# EAGLE board Servo motor with Arduino  (EAGLE 9.7.0)

Size 205.78 x 82.24 mm. Coordinates in mm from the lower left corner, seen from the top.
Outline: 0,0 205.78,0 205.78,82.24 0,82.24 0,0
Copper layers (1*16): Top 0.035mm / dielectric 1.5mm / Bottom 0.035mm
Design rules "default": minimum track width 6mil, minimum drill 0.35mm, track to track 6mil, track to pad 6mil, pad to pad 6mil, via to via 6mil, smd to smd 6mil, copper to edge 40mil, drill to drill 6mil, minimum pad ring 10mil, minimum via ring 8mil, stop-mask expansion 4mil, vias tented up to drill 0mil, thermal gap 10mil

## Footprints (pad centres in the part's own frame; a part is rotated, then mirrored left to right if it is on the bottom)
HA-06-SM065 = drill 1 pad 1.676: 1 -2.54,-2.54; 2 0,2.54; 3 2.54,-2.54
SG90 = drill 1.016 long: 1 -2.54,0; 2 0,0; 3 2.54,0
ARDUINO-UNO-R3-SHIELD = drill 1.016 pad 1.88: 3.3V 24.13,-2.54; 5V 24.13,0; A0 24.13,12.7; A1 24.13,15.24; A2 24.13,17.78; A3 24.13,20.32; A4 24.13,22.86; A5 24.13,25.4; AREF -24.13,-13.97; D2 -24.13,20.32; D3 -24.13,17.78; D4 -24.13,15.24; D5 -24.13,12.7; D6 -24.13,10.16; D7 -24.13,7.62; D8 -24.13,3.81; D9 -24.13,1.27; D10 -24.13,-1.27; D11 -24.13,-3.81; D12 -24.13,-6.35; D13 -24.13,-8.89; GND@0 24.13,2.54; GND@1 24.13,5.08; GND@2 -24.13,-11.43; IOREF 24.13,-7.62; NC 24.13,-10.16; RES 24.13,-5.08; RX -24.13,25.4; SCL -24.13,-19.05; SDA -24.13,-16.51; TX -24.13,22.86; VIN 24.13,7.62

## Placement (x,y rotation side)
RPOT1  250k  [HA-06-SM065]  180.71,28.1 0 top
RPOT2  150  [HA-06-SM065]  162.93,28.1 0 top
RPOT3  150  [HA-06-SM065]  147.69,28.1 0 top
RPOT4  150  [HA-06-SM065]  132.45,28.1 0 top
RPOT5  250  [HA-06-SM065]  117.21,28.1 0 top
RPOT14  250  [HA-06-SM065]  101.97,28.1 0 top
SERVO1  SERVOSG90  [SG90]  114.45,73.89 180 top
SERVO3  SERVOSG90  [SG90]  129.8,73.89 180 top
SERVO4  SERVOSG90  [SG90]  145.41,74.22 180 top
SERVO5  SERVOSG90  [SG90]  160.05,74.87 180 top
SERVO6  SERVOSG90  [SG90]  177.84,75.25 180 top
SERVO7  SERVOSG90  [SG90]  198.72,75.25 180 top
U2  ARDUINO-UNO-R3-SHIELD  [ARDUINO-UNO-R3-SHIELD]  47.88,29.84 270 top

## Library data of the parts
RPOT1-RPOT5 RPOT14 SERVO1 SERVO3-SERVO7 U2 = Tinkercad

## Nets
U2_5V: RPOT1.1 RPOT2.1 RPOT3.1 RPOT4.1 RPOT5.1 RPOT14.1 SERVO1.2 SERVO3.2 SERVO4.2 SERVO5.2 SERVO6.2 SERVO7.2 U2.5V
U2_A0: RPOT14.2 U2.A0
U2_A1: RPOT5.2 U2.A1
U2_A2: RPOT4.2 U2.A2
U2_A3: RPOT3.2 U2.A3
U2_A4: RPOT2.2 U2.A4
U2_A5: RPOT1.2 U2.A5
U2_D2: SERVO1.3 U2.D2
U2_D3: SERVO3.3 U2.D3
U2_D4: SERVO4.3 U2.D4
U2_D5: SERVO5.3 U2.D5
U2_D6: SERVO6.3 U2.D6
U2_D7: SERVO7.3 U2.D7
U2_GND: RPOT1.3 RPOT2.3 RPOT3.3 RPOT4.3 RPOT5.3 RPOT14.3 SERVO1.1 SERVO3.1 SERVO4.1 SERVO5.1 SERVO6.1 SERVO7.1 U2.GND@0 U2.GND@1 U2.GND@2

## Tracks (layer width: path | path; a pad name or v marks a point on that pad's centre or on a via)
U2_5V  (12 unrouted)
U2_A0  (1 unrouted)
U2_A1  (1 unrouted)
U2_A2  (1 unrouted)
U2_A3  (1 unrouted)
U2_A4  (1 unrouted)
U2_A5  (1 unrouted)
U2_D2  (1 unrouted)
U2_D3  (1 unrouted)
U2_D4  (1 unrouted)
U2_D5  (1 unrouted)
U2_D6  (1 unrouted)
U2_D7  (1 unrouted)
U2_GND  (14 unrouted)